# EAGLE board KVM Keyboard - backup 2022.07.27 (EAGLE 9.6.2)

Size 460.75 x 147.5 mm. Coordinates in mm from the lower left corner, seen from the top.
Outline: 0,0 460.75,0 460.75,147.5 0,147.5 0,0
Copper layers (1*16): Top 0.035mm / dielectric 1.5mm / Bottom 0.035mm
Design rules "default": minimum track width 6mil, minimum drill 0.35mm, track to track 6mil, track to pad 6mil, pad to pad 6mil, via to via 6mil, smd to smd 6mil, copper to edge 40mil, drill to drill 6mil, minimum pad ring 10mil, minimum via ring 8mil, stop-mask expansion 4mil, vias tented up to drill 0mil, thermal gap 10mil

## Footprints (pad centres in the part's own frame; a part is rotated, then mirrored left to right if it is on the bottom)
CHOC-1U = drill 1.2 pad 2.54: CHOC1 0,5.9; CHOC2 5,3.8 | hole 3.4: 0,0 | hole 0.6: -5.22,-4.2 | hole 1.85: -5.5,0; 5.5,0
CHOC-2U = drill 1.2 pad 2.54: CHOC1 0,5.9; CHOC2 5,3.8 | hole 3.4: 0,0 | hole 0.6: -5.22,-4.2 | hole 1.85: -5.5,0; 5.5,0 | hole 3.05: -11.9,7; 11.9,7 | hole 4: -11.9,-8.24; 11.9,-8.24
ROTARY_ENC_PLAIN = drill 1.016: A 7.493,-2.54; B 7.493,2.54; C 7.493,0; SW+ -6.985,2.54; SW- -6.985,-2.54 | drill 2.286: P$3 0,6.604; P$4 0,-6.604
TACT_PANA-EVQ = drill 1.3 pad 2.54: P$1 -3.25,0; P$2 3.25,0
LED-TRICOLOR-5050 = smd 2 x 1.1: 1 -2.4,1.7; 2 -2.4,0; 3 -2.4,-1.7; 4 2.4,-1.7; 5 2.4,0; 6 2.4,1.7
CHOC-6.25U = drill 1.2 pad 2.54: CHOC1 0,5.9; CHOC2 5,3.8 | hole 3.4: 0,0 | hole 0.6: -5.22,-4.2 | hole 1.85: -5.5,0; 5.5,0 | hole 3.05: -50,7; 50,7 | hole 4: -50,-8.24; 50,-8.24

## Placement (x,y rotation side)
A  KEYSWITCH-PLAIN-CHOC-1U  [CHOC-1U]  71.25,52.25 0 top
B  KEYSWITCH-PLAIN-CHOC-1U  [CHOC-1U]  156.75,33.25 0 top
BACKSLASH  KEYSWITCH-PLAIN-CHOC-1U  [CHOC-1U]  299.25,71.25 0 top
BACKSPACE  KEYSWITCH-PLAIN-CHOC-2U  [CHOC-2U]  294.5,90.25 0 top
BLUE_ROTENC  ENCODER-SWITCH  [ROTARY_ENC_PLAIN]  185.25,133 0 top
BRACE-CLOSING  KEYSWITCH-PLAIN-CHOC-1U  [CHOC-1U]  275.5,71.25 0 top
BRACE-OPENING  KEYSWITCH-PLAIN-CHOC-1U  [CHOC-1U]  256.5,71.25 0 top
BRIGHTNESS  ENCODER-SWITCH  [ROTARY_ENC_PLAIN]  204.25,133 0 top
BRIGHTNESS-MINUS  KEYSWITCH-PLAIN-CHOC-1U  [CHOC-1U]  285,133 0 top
BRIGHTNESS-PLUS  KEYSWITCH-PLAIN-CHOC-1U  [CHOC-1U]  266,133 0 top
C  KEYSWITCH-PLAIN-CHOC-1U  [CHOC-1U]  118.75,33.25 0 top
CALC  KEYSWITCH-PLAIN-CHOC-1U  [CHOC-1U]  346.75,133 0 top
CAPS-LOCK  KEYSWITCH-PLAIN-CHOC-1U  [CHOC-1U]  45.12,52.25 0 top
COLON  KEYSWITCH-PLAIN-CHOC-1U  [CHOC-1U]  242.25,52.25 0 top
D  KEYSWITCH-PLAIN-CHOC-1U  [CHOC-1U]  109.25,52.25 0 top
DELETE  KEYSWITCH-PLAIN-CHOC-1U  [CHOC-1U]  327.75,71.25 0 top
DOWN  KEYSWITCH-PLAIN-CHOC-1U  [CHOC-1U]  346.75,14.25 0 top
E  KEYSWITCH-PLAIN-CHOC-1U  [CHOC-1U]  104.5,71.25 0 top
END  KEYSWITCH-PLAIN-CHOC-1U  [CHOC-1U]  346.75,71.25 0 top
ENTER  KEYSWITCH-PLAIN-CHOC-2U  [CHOC-2U]  292.12,52.25 0 top
ESC  KEYSWITCH-PLAIN-CHOC-1U  [CHOC-1U]  38,114 0 top
F  KEYSWITCH-PLAIN-CHOC-1U  [CHOC-1U]  128.25,52.25 0 top
F1  KEYSWITCH-PLAIN-CHOC-1U  [CHOC-1U]  66.5,114 0 top
F2  KEYSWITCH-PLAIN-CHOC-1U  [CHOC-1U]  85.5,114 0 top
F3  KEYSWITCH-PLAIN-CHOC-1U  [CHOC-1U]  104.5,114 0 top
F4  KEYSWITCH-PLAIN-CHOC-1U  [CHOC-1U]  123.5,114 0 top
F5  KEYSWITCH-PLAIN-CHOC-1U  [CHOC-1U]  147.25,114 0 top
F6  KEYSWITCH-PLAIN-CHOC-1U  [CHOC-1U]  166.25,114 0 top
F7  KEYSWITCH-PLAIN-CHOC-1U  [CHOC-1U]  185.25,114 0 top
F8  KEYSWITCH-PLAIN-CHOC-1U  [CHOC-1U]  204.25,114 0 top
F9  KEYSWITCH-PLAIN-CHOC-1U  [CHOC-1U]  228,114 0 top
F10  KEYSWITCH-PLAIN-CHOC-1U  [CHOC-1U]  247,114 0 top
F11  KEYSWITCH-PLAIN-CHOC-1U  [CHOC-1U]  266,114 0 top
F12  KEYSWITCH-PLAIN-CHOC-1U  [CHOC-1U]  285,114 0 top
FN  [TACT_PANA-EVQ]  14.25,92.62 0 top
FOLDER  KEYSWITCH-PLAIN-CHOC-1U  [CHOC-1U]  327.75,133 0 top
G  KEYSWITCH-PLAIN-CHOC-1U  [CHOC-1U]  147.25,52.25 0 top
GREATER-THAN  KEYSWITCH-PLAIN-CHOC-1U  [CHOC-1U]  232.75,33.25 0 top
GREEN_ROTENC  ENCODER-SWITCH  [ROTARY_ENC_PLAIN]  166.25,133 0 top
H  KEYSWITCH-PLAIN-CHOC-1U  [CHOC-1U]  166.25,52.25 0 top
HIBERNATE  KEYSWITCH-PLAIN-CHOC-1U  [CHOC-1U]  14.25,133 0 top
HOME  KEYSWITCH-PLAIN-CHOC-1U  [CHOC-1U]  346.75,90.25 0 top
I  KEYSWITCH-PLAIN-CHOC-1U  [CHOC-1U]  199.5,71.25 0 top
INSERT  KEYSWITCH-PLAIN-CHOC-1U  [CHOC-1U]  327.75,90.25 0 top
J  KEYSWITCH-PLAIN-CHOC-1U  [CHOC-1U]  185.25,52.25 0 top
K  KEYSWITCH-PLAIN-CHOC-1U  [CHOC-1U]  204.25,52.25 0 top
KVM_PC1  KEYSWITCH-PLAIN-CHOC-1U  [CHOC-1U]  14.25,71.25 0 top
KVM_PC2  KEYSWITCH-PLAIN-CHOC-1U  [CHOC-1U]  14.25,52.25 0 top
KVM_PC3  KEYSWITCH-PLAIN-CHOC-1U  [CHOC-1U]  14.25,33.25 0 top
KVM_PC4  KEYSWITCH-PLAIN-CHOC-1U  [CHOC-1U]  14.25,14.25 0 top
L  KEYSWITCH-PLAIN-CHOC-1U  [CHOC-1U]  223.25,52.25 0 top
LCD-BUTTON-BOTTOM  [TACT_PANA-EVQ]  306.38,114 0 top
LCD-BUTTON-TOP  [TACT_PANA-EVQ]  306.38,133 0 top
LEFT  KEYSWITCH-PLAIN-CHOC-1U  [CHOC-1U]  327.75,14.25 0 top
LEFT-ALT  KEYSWITCH-PLAIN-CHOC-1U  [CHOC-1U]  87.88,14.25 0 top
LEFT-CTRL  KEYSWITCH-PLAIN-CHOC-1U  [CHOC-1U]  40.38,14.25 0 top
LEFT-SUPER  KEYSWITCH-PLAIN-CHOC-1U  [CHOC-1U]  64.12,14.25 0 top
LESS-THAN  KEYSWITCH-PLAIN-CHOC-1U  [CHOC-1U]  213.75,33.25 0 top
LSHIFT  KEYSWITCH-PLAIN-CHOC-2U  [CHOC-2U]  49.88,33.25 0 top
M  KEYSWITCH-PLAIN-CHOC-1U  [CHOC-1U]  194.75,33.25 0 top
MENU  KEYSWITCH-PLAIN-CHOC-1U  [CHOC-1U]  277.88,14.25 0 top
MUTE  KEYSWITCH-PLAIN-CHOC-1U  [CHOC-1U]  427.5,133 0 top
N  KEYSWITCH-PLAIN-CHOC-1U  [CHOC-1U]  175.75,33.25 0 top
NEXT  KEYSWITCH-PLAIN-CHOC-1U  [CHOC-1U]  446.5,114 0 top
NOTES  KEYSWITCH-PLAIN-CHOC-1U  [CHOC-1U]  365.75,133 0 top
NUM0  KEYSWITCH-PLAIN-CHOC-1U  [CHOC-1U]  228,90.25 0 top
NUM1  KEYSWITCH-PLAIN-CHOC-1U  [CHOC-1U]  57,90.25 0 top
NUM2  KEYSWITCH-PLAIN-CHOC-1U  [CHOC-1U]  76,90.25 0 top
NUM3  KEYSWITCH-PLAIN-CHOC-1U  [CHOC-1U]  95,90.25 0 top
NUM4  KEYSWITCH-PLAIN-CHOC-1U  [CHOC-1U]  114,90.25 0 top
NUM5  KEYSWITCH-PLAIN-CHOC-1U  [CHOC-1U]  133,90.25 0 top
NUM6  KEYSWITCH-PLAIN-CHOC-1U  [CHOC-1U]  152,90.25 0 top
NUM7  KEYSWITCH-PLAIN-CHOC-1U  [CHOC-1U]  171,90.25 0 top
NUM8  KEYSWITCH-PLAIN-CHOC-1U  [CHOC-1U]  190,90.25 0 top
NUM9  KEYSWITCH-PLAIN-CHOC-1U  [CHOC-1U]  209,90.25 0 top
NUM-LOCK  KEYSWITCH-PLAIN-CHOC-1U  [CHOC-1U]  389.5,90.25 0 top
NUM-MINUS  KEYSWITCH-PLAIN-CHOC-1U  [CHOC-1U]  247,90.25 0 top
NUM-PLUS  KEYSWITCH-PLAIN-CHOC-1U  [CHOC-1U]  266,90.25 0 top
O  KEYSWITCH-PLAIN-CHOC-1U  [CHOC-1U]  218.5,71.25 0 top
P  KEYSWITCH-PLAIN-CHOC-1U  [CHOC-1U]  237.5,71.25 0 top
PAD0  KEYSWITCH-PLAIN-CHOC-2U  [CHOC-2U]  399,14.25 0 top
PAD1  KEYSWITCH-PLAIN-CHOC-1U  [CHOC-1U]  389.5,33.25 0 top
PAD2  KEYSWITCH-PLAIN-CHOC-1U  [CHOC-1U]  408.5,33.25 0 top
PAD3  KEYSWITCH-PLAIN-CHOC-1U  [CHOC-1U]  427.5,33.25 0 top
PAD4  KEYSWITCH-PLAIN-CHOC-1U  [CHOC-1U]  389.5,52.25 0 top
PAD5  KEYSWITCH-PLAIN-CHOC-1U  [CHOC-1U]  408.5,52.25 0 top
PAD6  KEYSWITCH-PLAIN-CHOC-1U  [CHOC-1U]  427.5,52.25 0 top
PAD7  KEYSWITCH-PLAIN-CHOC-1U  [CHOC-1U]  389.5,71.25 0 top
PAD8  KEYSWITCH-PLAIN-CHOC-1U  [CHOC-1U]  408.5,71.25 0 top
PAD9  KEYSWITCH-PLAIN-CHOC-1U  [CHOC-1U]  427.5,71.25 0 top
PAD-ASTERISK  KEYSWITCH-PLAIN-CHOC-1U  [CHOC-1U]  427.5,90.25 0 top
PAD-ENTER  KEYSWITCH-PLAIN-CHOC-2U  [CHOC-2U]  446.5,23.75 90 top
PAD-MINUS  KEYSWITCH-PLAIN-CHOC-1U  [CHOC-1U]  446.5,90.25 0 top
PAD-PERIOD  KEYSWITCH-PLAIN-CHOC-1U  [CHOC-1U]  427.5,14.25 0 top
PAD-PLUS  KEYSWITCH-PLAIN-CHOC-2U  [CHOC-2U]  446.5,61.75 90 top
PAD-SLASH  KEYSWITCH-PLAIN-CHOC-1U  [CHOC-1U]  408.5,90.25 0 top
PAGE-DOWN  KEYSWITCH-PLAIN-CHOC-1U  [CHOC-1U]  365.75,71.25 0 top
PAGE-UP  KEYSWITCH-PLAIN-CHOC-1U  [CHOC-1U]  365.75,90.25 0 top
PLAY-PAUSE  KEYSWITCH-PLAIN-CHOC-1U  [CHOC-1U]  427.5,114 0 top
PRESENT  KEYSWITCH-PLAIN-CHOC-1U  [CHOC-1U]  228,133 0 top
PREVIOUS  KEYSWITCH-PLAIN-CHOC-1U  [CHOC-1U]  408.5,114 0 top
PRINT-SCREEN  KEYSWITCH-PLAIN-CHOC-1U  [CHOC-1U]  327.75,114 0 top
Q  KEYSWITCH-PLAIN-CHOC-1U  [CHOC-1U]  66.5,71.25 0 top
QUESTION-MARK  KEYSWITCH-PLAIN-CHOC-1U  [CHOC-1U]  251.75,33.25 0 top
QUOTATION-MARK  KEYSWITCH-PLAIN-CHOC-1U  [CHOC-1U]  261.25,52.25 0 top
R  KEYSWITCH-PLAIN-CHOC-1U  [CHOC-1U]  123.5,71.25 0 top
RECORD  KEYSWITCH-PLAIN-CHOC-1U  [CHOC-1U]  346.75,114 0 top
RED_ROTENC  ENCODER-SWITCH  [ROTARY_ENC_PLAIN]  147.25,133 0 top
RES-ABOVE-F10  KEYSWITCH-PLAIN-CHOC-1U  [CHOC-1U]  247,133 0 top
RES-BY-ESC  KEYSWITCH-PLAIN-CHOC-1U  [CHOC-1U]  38,133 0 top
RES-DELETE  [TACT_PANA-EVQ]  327.75,52.25 0 top
RES-END  [TACT_PANA-EVQ]  346.75,52.25 0 top
RES-LEFT  [TACT_PANA-EVQ]  327.75,33.25 0 top
RES-PGDN  [TACT_PANA-EVQ]  365.75,52.25 0 top
RES-RIGHT  [TACT_PANA-EVQ]  365.75,33.25 0 top
RGB_A  [LED-TRICOLOR-5050]  71.25,47.5 0 top
RGB_B  [LED-TRICOLOR-5050]  156.75,28.5 0 top
RGB_BACKSLASH  [LED-TRICOLOR-5050]  299.25,66.5 0 top
RGB_BACKSPACE  [LED-TRICOLOR-5050]  294.5,85.5 0 top
RGB_BLUE-ROTENC  [LED-TRICOLOR-5050]  190,128.25 0 top
RGB_BRACE-CLOSING  [LED-TRICOLOR-5050]  275.5,66.5 0 top
RGB_BRACE-OPENING  [LED-TRICOLOR-5050]  256.5,66.5 0 top
RGB_BRIGHTNESS  [LED-TRICOLOR-5050]  209,128.25 0 top
RGB_BRIGHTNESS-MINUS  [LED-TRICOLOR-5050]  285,128.25 0 top
RGB_BRIGHTNESS-PLUS  [LED-TRICOLOR-5050]  266,128.25 0 top
RGB_C  [LED-TRICOLOR-5050]  118.75,28.5 0 top
RGB_CALC  [LED-TRICOLOR-5050]  346.75,128.25 0 top
RGB_CAPS-LOCK  [LED-TRICOLOR-5050]  45.12,47.5 0 top
RGB_COLON  [LED-TRICOLOR-5050]  242.25,47.5 0 top
RGB_D  [LED-TRICOLOR-5050]  109.25,47.5 0 top
RGB_DELETE  [LED-TRICOLOR-5050]  327.75,66.5 0 top
RGB_DOWN  [LED-TRICOLOR-5050]  346.75,9.5 0 top
RGB_E  [LED-TRICOLOR-5050]  104.5,66.5 0 top
RGB_END  [LED-TRICOLOR-5050]  346.75,66.5 0 top
RGB_ENTER  [LED-TRICOLOR-5050]  292.12,47.5 0 top
RGB_ESC  [LED-TRICOLOR-5050]  38,109.25 0 top
RGB_F  [LED-TRICOLOR-5050]  128.25,47.5 0 top
RGB_F1  [LED-TRICOLOR-5050]  66.5,109.25 0 top
RGB_F2  [LED-TRICOLOR-5050]  85.5,109.25 0 top
RGB_F3  [LED-TRICOLOR-5050]  104.5,109.25 0 top
RGB_F4  [LED-TRICOLOR-5050]  123.5,109.25 0 top
RGB_F5  [LED-TRICOLOR-5050]  147.25,109.25 0 top
RGB_F6  [LED-TRICOLOR-5050]  166.25,109.25 0 top
RGB_F7  [LED-TRICOLOR-5050]  185.25,109.25 0 top
RGB_F8  [LED-TRICOLOR-5050]  204.25,109.25 0 top
RGB_F9  [LED-TRICOLOR-5050]  228,109.25 0 top
RGB_F10  [LED-TRICOLOR-5050]  247,109.25 0 top
RGB_F11  [LED-TRICOLOR-5050]  266,109.25 0 top
RGB_F12  [LED-TRICOLOR-5050]  285,109.25 0 top
RGB_FN  [LED-TRICOLOR-5050]  14.25,87.88 0 top
RGB_FOLDER  [LED-TRICOLOR-5050]  327.75,128.25 0 top
RGB_G  [LED-TRICOLOR-5050]  147.25,47.5 0 top
RGB_GREATER-THAN  [LED-TRICOLOR-5050]  232.75,28.5 0 top
RGB_GREEN-ROTENC  [LED-TRICOLOR-5050]  171,128.25 0 top
RGB_H  [LED-TRICOLOR-5050]  166.25,47.5 0 top
RGB_HIBERNATE  [LED-TRICOLOR-5050]  14.25,128.25 0 top
RGB_HOME  [LED-TRICOLOR-5050]  346.75,85.5 0 top
RGB_I  [LED-TRICOLOR-5050]  199.5,66.5 0 top
RGB_INSERT  [LED-TRICOLOR-5050]  327.75,85.5 0 top
RGB_J  [LED-TRICOLOR-5050]  185.25,47.5 0 top
RGB_K  [LED-TRICOLOR-5050]  204.25,47.5 0 top
RGB_KVM-PC1  [LED-TRICOLOR-5050]  14.25,66.5 0 top
RGB_KVM-PC2  [LED-TRICOLOR-5050]  14.25,47.5 0 top
RGB_KVM-PC3  [LED-TRICOLOR-5050]  14.25,28.5 0 top
RGB_KVM-PC4  [LED-TRICOLOR-5050]  14.25,9.5 0 top
RGB_L  [LED-TRICOLOR-5050]  223.25,47.5 0 top
RGB_LCD-BUTTON-BOTTOM  [LED-TRICOLOR-5050]  306.38,109.25 0 top
RGB_LCD-BUTTON-TOP  [LED-TRICOLOR-5050]  306.38,128.25 0 top
RGB_LEFT  [LED-TRICOLOR-5050]  327.75,9.5 0 top
RGB_LEFT-ALT  [LED-TRICOLOR-5050]  87.88,9.5 0 top
RGB_LEFT-CTRL  [LED-TRICOLOR-5050]  40.38,9.5 0 top
RGB_LEFT-SUPER  [LED-TRICOLOR-5050]  64.12,9.5 0 top
RGB_LESS-THAN  [LED-TRICOLOR-5050]  213.75,28.5 0 top
RGB_LSHIFT  [LED-TRICOLOR-5050]  49.88,28.5 0 top
RGB_M  [LED-TRICOLOR-5050]  194.75,28.5 0 top
RGB_MENU  [LED-TRICOLOR-5050]  277.88,9.5 0 top
RGB_MUTE  [LED-TRICOLOR-5050]  427.5,128.25 0 top
RGB_N  [LED-TRICOLOR-5050]  175.75,28.5 0 top
RGB_NEXT  [LED-TRICOLOR-5050]  446.5,109.25 0 top
RGB_NOTES  [LED-TRICOLOR-5050]  365.75,128.25 0 top
RGB_NUM0  [LED-TRICOLOR-5050]  228,85.5 0 top
RGB_NUM1  [LED-TRICOLOR-5050]  57,85.5 0 top
RGB_NUM2  [LED-TRICOLOR-5050]  76,85.5 0 top
RGB_NUM3  [LED-TRICOLOR-5050]  95,85.5 0 top
RGB_NUM4  [LED-TRICOLOR-5050]  114,85.5 0 top
RGB_NUM5  [LED-TRICOLOR-5050]  133,85.5 0 top
RGB_NUM6  [LED-TRICOLOR-5050]  152,85.5 0 top
RGB_NUM7  [LED-TRICOLOR-5050]  171,85.5 0 top
RGB_NUM8  [LED-TRICOLOR-5050]  190,85.5 0 top
RGB_NUM9  [LED-TRICOLOR-5050]  209,85.5 0 top
RGB_NUM-LOCK  [LED-TRICOLOR-5050]  389.5,85.5 0 top
RGB_NUM-MINUS  [LED-TRICOLOR-5050]  247,85.5 0 top
RGB_NUM-PLUS  [LED-TRICOLOR-5050]  266,85.5 0 top
RGB_O  [LED-TRICOLOR-5050]  218.5,66.5 0 top
RGB_P  [LED-TRICOLOR-5050]  237.5,66.5 0 top
RGB_PAD0  [LED-TRICOLOR-5050]  399,9.5 0 top
RGB_PAD1  [LED-TRICOLOR-5050]  389.5,28.5 0 top
RGB_PAD2  [LED-TRICOLOR-5050]  408.5,28.5 0 top
RGB_PAD3  [LED-TRICOLOR-5050]  427.5,28.5 0 top
RGB_PAD4  [LED-TRICOLOR-5050]  389.5,47.5 0 top
RGB_PAD5  [LED-TRICOLOR-5050]  408.5,47.5 0 top
RGB_PAD6  [LED-TRICOLOR-5050]  427.5,47.5 0 top
RGB_PAD7  [LED-TRICOLOR-5050]  389.5,66.5 0 top
RGB_PAD8  [LED-TRICOLOR-5050]  408.5,66.5 0 top
RGB_PAD9  [LED-TRICOLOR-5050]  427.5,66.5 0 top
RGB_PAD-ASTERISK  [LED-TRICOLOR-5050]  427.5,85.5 0 top
RGB_PAD-ENTER  [LED-TRICOLOR-5050]  451.25,23.75 90 top
RGB_PAD-MINUS  [LED-TRICOLOR-5050]  446.5,85.5 0 top
RGB_PAD-PERIOD  [LED-TRICOLOR-5050]  427.5,9.5 0 top
RGB_PAD-PLUS  [LED-TRICOLOR-5050]  451.25,61.75 90 top
RGB_PAD-SLASH  [LED-TRICOLOR-5050]  408.5,85.5 0 top
RGB_PAGE-DOWN  [LED-TRICOLOR-5050]  365.75,66.5 0 top
RGB_PAGE-UP  [LED-TRICOLOR-5050]  365.75,85.5 0 top
RGB_PLAY-PAUSE  [LED-TRICOLOR-5050]  427.5,109.25 0 top
RGB_PRESENT  [LED-TRICOLOR-5050]  228,128.25 0 top
RGB_PREVIOUS  [LED-TRICOLOR-5050]  408.5,109.25 0 top
RGB_PRINT-SCREEN  [LED-TRICOLOR-5050]  327.75,109.25 0 top
RGB_Q  [LED-TRICOLOR-5050]  66.5,66.5 0 top
RGB_QUESTION-MARK  [LED-TRICOLOR-5050]  251.75,28.5 0 top
RGB_QUOTATION-MARK  [LED-TRICOLOR-5050]  261.25,47.5 0 top
RGB_R  [LED-TRICOLOR-5050]  123.5,66.5 0 top
RGB_RECORD  [LED-TRICOLOR-5050]  346.75,109.25 0 top
RGB_RED-ROTENC  [LED-TRICOLOR-5050]  152,128.25 0 top
RGB_RES-ABOVE-F10  [LED-TRICOLOR-5050]  247,128.25 0 top
RGB_RES-BY-ESC  [LED-TRICOLOR-5050]  38,128.25 0 top
RGB_RES-DELETE  [LED-TRICOLOR-5050]  327.75,47.5 0 top
RGB_RES-END  [LED-TRICOLOR-5050]  346.75,47.5 0 top
RGB_RES-LEFT  [LED-TRICOLOR-5050]  327.75,28.5 0 top
RGB_RES-PGDN  [LED-TRICOLOR-5050]  365.75,47.5 0 top
RGB_RES-RIGHT  [LED-TRICOLOR-5050]  365.75,28.5 0 top
RGB_RIGHT  [LED-TRICOLOR-5050]  365.75,9.5 0 top
RGB_RIGHT-ALT  [LED-TRICOLOR-5050]  230.38,9.5 0 top
RGB_RIGHT-CTRL  [LED-TRICOLOR-5050]  301.62,9.5 0 top
RGB_RIGHT-SUPER  [LED-TRICOLOR-5050]  254.12,9.5 0 top
RGB_RSHIFT  [LED-TRICOLOR-5050]  287.38,28.5 0 top
RGB_S  [LED-TRICOLOR-5050]  90.25,47.5 0 top
RGB_SAVE-CLIP  [LED-TRICOLOR-5050]  365.75,109.25 0 top
RGB_SKIP-BACK  [LED-TRICOLOR-5050]  389.5,128.25 0 top
RGB_SKIP-FORWARD  [LED-TRICOLOR-5050]  408.5,128.25 0 top
RGB_SLEEP  [LED-TRICOLOR-5050]  14.25,109.25 0 top
RGB_SPACE  [LED-TRICOLOR-5050]  159.12,9.5 0 top
RGB_STOP  [LED-TRICOLOR-5050]  389.5,109.25 0 top
RGB_T  [LED-TRICOLOR-5050]  142.5,66.5 0 top
RGB_TAB  [LED-TRICOLOR-5050]  42.75,66.5 0 top
RGB_TILDA  [LED-TRICOLOR-5050]  38,85.5 0 top
RGB_U  [LED-TRICOLOR-5050]  180.5,66.5 0 top
RGB_UP  [LED-TRICOLOR-5050]  346.75,28.5 0 top
RGB_V  [LED-TRICOLOR-5050]  137.75,28.5 0 top
RGB_VOLUME-MASTER  [LED-TRICOLOR-5050]  453.62,125.88 0 top
RGB_VOLUME-PC1  [LED-TRICOLOR-5050]  71.25,128.25 0 top
RGB_VOLUME-PC2  [LED-TRICOLOR-5050]  90.25,128.25 0 top
RGB_VOLUME-PC3  [LED-TRICOLOR-5050]  109.25,128.25 0 top
RGB_VOLUME-PC4  [LED-TRICOLOR-5050]  128.25,128.25 0 top
RGB_W  [LED-TRICOLOR-5050]  85.5,66.5 0 top
RGB_X  [LED-TRICOLOR-5050]  99.75,28.5 0 top
RGB_Y  [LED-TRICOLOR-5050]  161.5,66.5 0 top
RGB_Z  [LED-TRICOLOR-5050]  80.75,28.5 0 top
RIGHT  KEYSWITCH-PLAIN-CHOC-1U  [CHOC-1U]  365.75,14.25 0 top
RIGHT-ALT  KEYSWITCH-PLAIN-CHOC-1U  [CHOC-1U]  230.38,14.25 0 top
RIGHT-CTRL  KEYSWITCH-PLAIN-CHOC-1U  [CHOC-1U]  301.62,14.25 0 top
RIGHT-SUPER  KEYSWITCH-PLAIN-CHOC-1U  [CHOC-1U]  254.12,14.25 0 top
RSHIFT  KEYSWITCH-PLAIN-CHOC-2U  [CHOC-2U]  287.38,33.25 0 top
S  KEYSWITCH-PLAIN-CHOC-1U  [CHOC-1U]  90.25,52.25 0 top
SAVE_CLIP  KEYSWITCH-PLAIN-CHOC-1U  [CHOC-1U]  365.75,114 0 top
SKIP-BACK  KEYSWITCH-PLAIN-CHOC-1U  [CHOC-1U]  389.5,133 0 top
SKIP-FORWARD  KEYSWITCH-PLAIN-CHOC-1U  [CHOC-1U]  408.5,133 0 top
SLEEP  KEYSWITCH-PLAIN-CHOC-1U  [CHOC-1U]  14.25,114 0 top
SPACE  KEYSWITCH-PLAIN-CHOC-6.25U  [CHOC-6.25U]  159.12,14.25 0 top
STOP  KEYSWITCH-PLAIN-CHOC-1U  [CHOC-1U]  389.5,114 0 top
T  KEYSWITCH-PLAIN-CHOC-1U  [CHOC-1U]  142.5,71.25 0 top
TAB  KEYSWITCH-PLAIN-CHOC-1U  [CHOC-1U]  42.75,71.25 0 top
TILDA  KEYSWITCH-PLAIN-CHOC-1U  [CHOC-1U]  38,90.25 0 top
U  KEYSWITCH-PLAIN-CHOC-1U  [CHOC-1U]  180.5,71.25 0 top
UP  KEYSWITCH-PLAIN-CHOC-1U  [CHOC-1U]  346.75,33.25 0 top
V  KEYSWITCH-PLAIN-CHOC-1U  [CHOC-1U]  137.75,33.25 0 top
VOLUME_MASTER  ENCODER-SWITCH  [ROTARY_ENC_PLAIN]  446.5,133 0 top
VOLUME_PC1  ENCODER-SWITCH  [ROTARY_ENC_PLAIN]  66.5,133 0 top
VOLUME_PC2  ENCODER-SWITCH  [ROTARY_ENC_PLAIN]  85.5,133 0 top
VOLUME_PC3  ENCODER-SWITCH  [ROTARY_ENC_PLAIN]  104.5,133 0 top
VOLUME_PC4  ENCODER-SWITCH  [ROTARY_ENC_PLAIN]  123.5,133 0 top
W  KEYSWITCH-PLAIN-CHOC-1U  [CHOC-1U]  85.5,71.25 0 top
X  KEYSWITCH-PLAIN-CHOC-1U  [CHOC-1U]  99.75,33.25 0 top
Y  KEYSWITCH-PLAIN-CHOC-1U  [CHOC-1U]  161.5,71.25 0 top
Z  KEYSWITCH-PLAIN-CHOC-1U  [CHOC-1U]  80.75,33.25 0 top

## Library data of the parts
A B BACKSLASH BACKSPACE BRACE-CLOSING BRACE-OPENING BRIGHTNESS-MINUS BRIGHTNESS-PLUS C CALC CAPS-LOCK COLON D DELETE DOWN E END ENTER ESC F F1-F12 FOLDER G GREATER-THAN H HIBERNATE HOME I INSERT J K KVM_PC1-KVM_PC4 L LEFT LEFT-ALT LEFT-CTRL LEFT-SUPER LESS-THAN LSHIFT M MENU MUTE N NEXT NOTES NUM0 NUM1-NUM9 NUM-LOCK NUM-MINUS NUM-PLUS O P PAD0 PAD1-PAD9 PAD-ASTERISK PAD-ENTER PAD-MINUS PAD-PERIOD PAD-PLUS PAD-SLASH PAGE-DOWN PAGE-UP PLAY-PAUSE PRESENT PREVIOUS PRINT-SCREEN Q QUESTION-MARK QUOTATION-MARK R RECORD RES-ABOVE-F10 RES-BY-ESC RIGHT RIGHT-ALT RIGHT-CTRL RIGHT-SUPER RSHIFT S SAVE_CLIP SKIP-BACK SKIP-FORWARD SLEEP SPACE STOP T TAB TILDA U UP V W X Y Z = bak-Keyboard
BLUE_ROTENC BRIGHTNESS GREEN_ROTENC RED_ROTENC VOLUME_MASTER VOLUME_PC1-VOLUME_PC4 = SparkFun-Switches; SF_SKU: COM-09117
FN LCD-BUTTON-BOTTOM LCD-BUTTON-TOP RES-DELETE RES-END RES-LEFT RES-PGDN RES-RIGHT = adafruit
RGB_A RGB_B RGB_BACKSLASH RGB_BACKSPACE RGB_BLUE-ROTENC RGB_BRACE-CLOSING RGB_BRACE-OPENING RGB_BRIGHTNESS RGB_BRIGHTNESS-MINUS RGB_BRIGHTNESS-PLUS RGB_C RGB_CALC RGB_CAPS-LOCK RGB_COLON RGB_D RGB_DELETE RGB_DOWN RGB_E RGB_END RGB_ENTER RGB_ESC RGB_F RGB_F1-RGB_F12 RGB_FN RGB_FOLDER RGB_G RGB_GREATER-THAN RGB_GREEN-ROTENC RGB_H RGB_HIBERNATE RGB_HOME RGB_I RGB_INSERT RGB_J RGB_K RGB_KVM-PC1-RGB_KVM-PC4 RGB_L RGB_LCD-BUTTON-BOTTOM RGB_LCD-BUTTON-TOP RGB_LEFT RGB_LEFT-ALT RGB_LEFT-CTRL RGB_LEFT-SUPER RGB_LESS-THAN RGB_LSHIFT RGB_M RGB_MENU RGB_MUTE RGB_N RGB_NEXT RGB_NOTES RGB_NUM0 RGB_NUM1-RGB_NUM9 RGB_NUM-LOCK RGB_NUM-MINUS RGB_NUM-PLUS RGB_O RGB_P RGB_PAD0 RGB_PAD1-RGB_PAD9 RGB_PAD-ASTERISK RGB_PAD-ENTER RGB_PAD-MINUS RGB_PAD-PERIOD RGB_PAD-PLUS RGB_PAD-SLASH RGB_PAGE-DOWN RGB_PAGE-UP RGB_PLAY-PAUSE RGB_PRESENT RGB_PREVIOUS RGB_PRINT-SCREEN RGB_Q RGB_QUESTION-MARK RGB_QUOTATION-MARK RGB_R RGB_RECORD RGB_RED-ROTENC RGB_RES-ABOVE-F10 RGB_RES-BY-ESC RGB_RES-DELETE RGB_RES-END RGB_RES-LEFT RGB_RES-PGDN RGB_RES-RIGHT RGB_RIGHT RGB_RIGHT-ALT RGB_RIGHT-CTRL RGB_RIGHT-SUPER RGB_RSHIFT RGB_S RGB_SAVE-CLIP RGB_SKIP-BACK RGB_SKIP-FORWARD RGB_SLEEP RGB_SPACE RGB_STOP RGB_T RGB_TAB RGB_TILDA RGB_U RGB_UP RGB_V RGB_VOLUME-MASTER RGB_VOLUME-PC1-RGB_VOLUME-PC4 RGB_W RGB_X RGB_Y RGB_Z = SparkFun-LED; PROD_ID: DIO-10298